# Altium PCB PCB1.PcbDoc
Units mm, origin at the board's own origin, x right, y up, seen from the top; angles counter-clockwise.
Board outline 38.86 x 37.59 mm, 2 copper layers (Top Layer, Bottom Layer); 20 components, 9 nets, 53 pads, 20 vias.
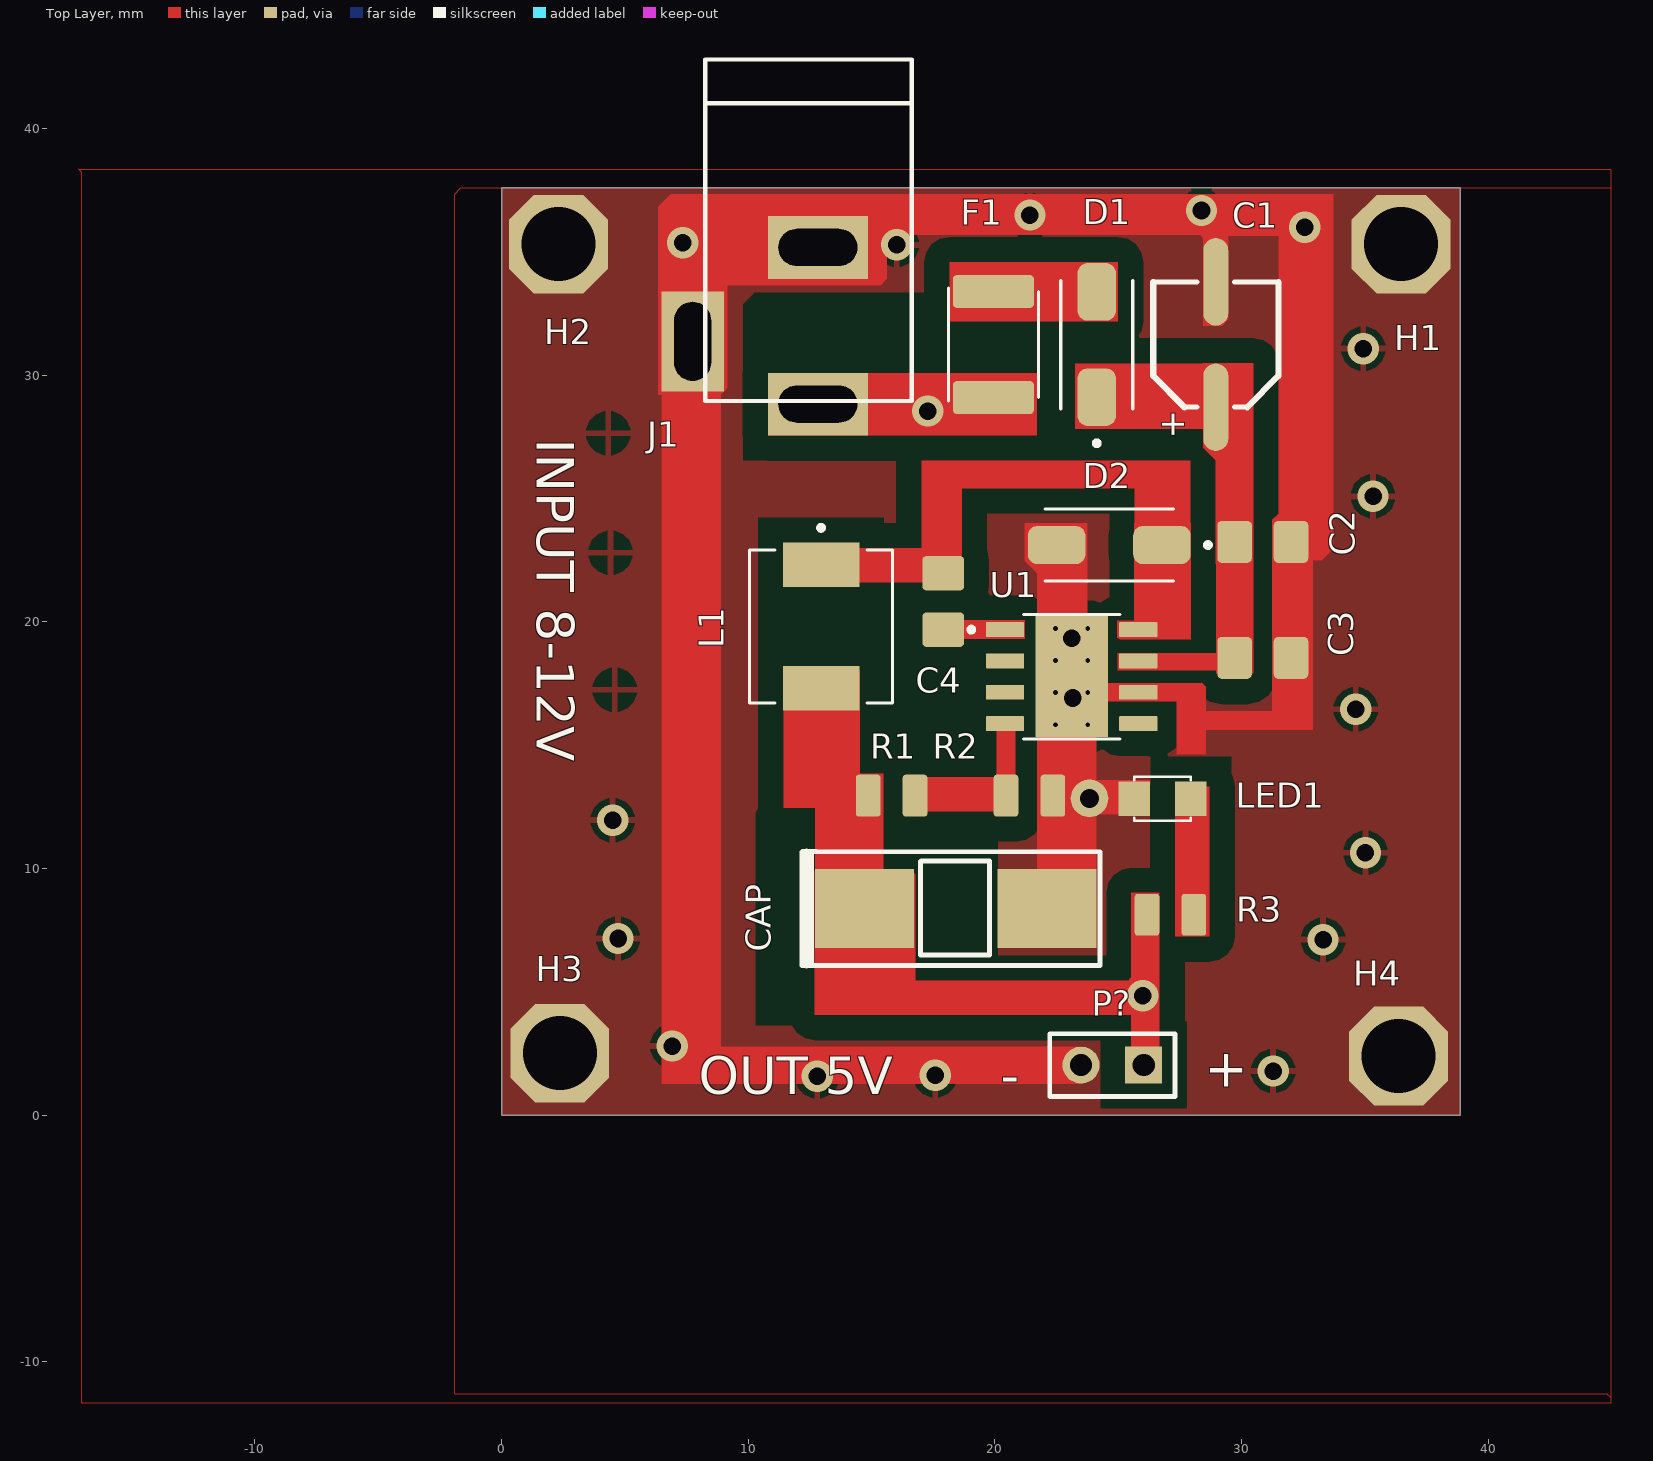
[diagram p0: Top Layer view]
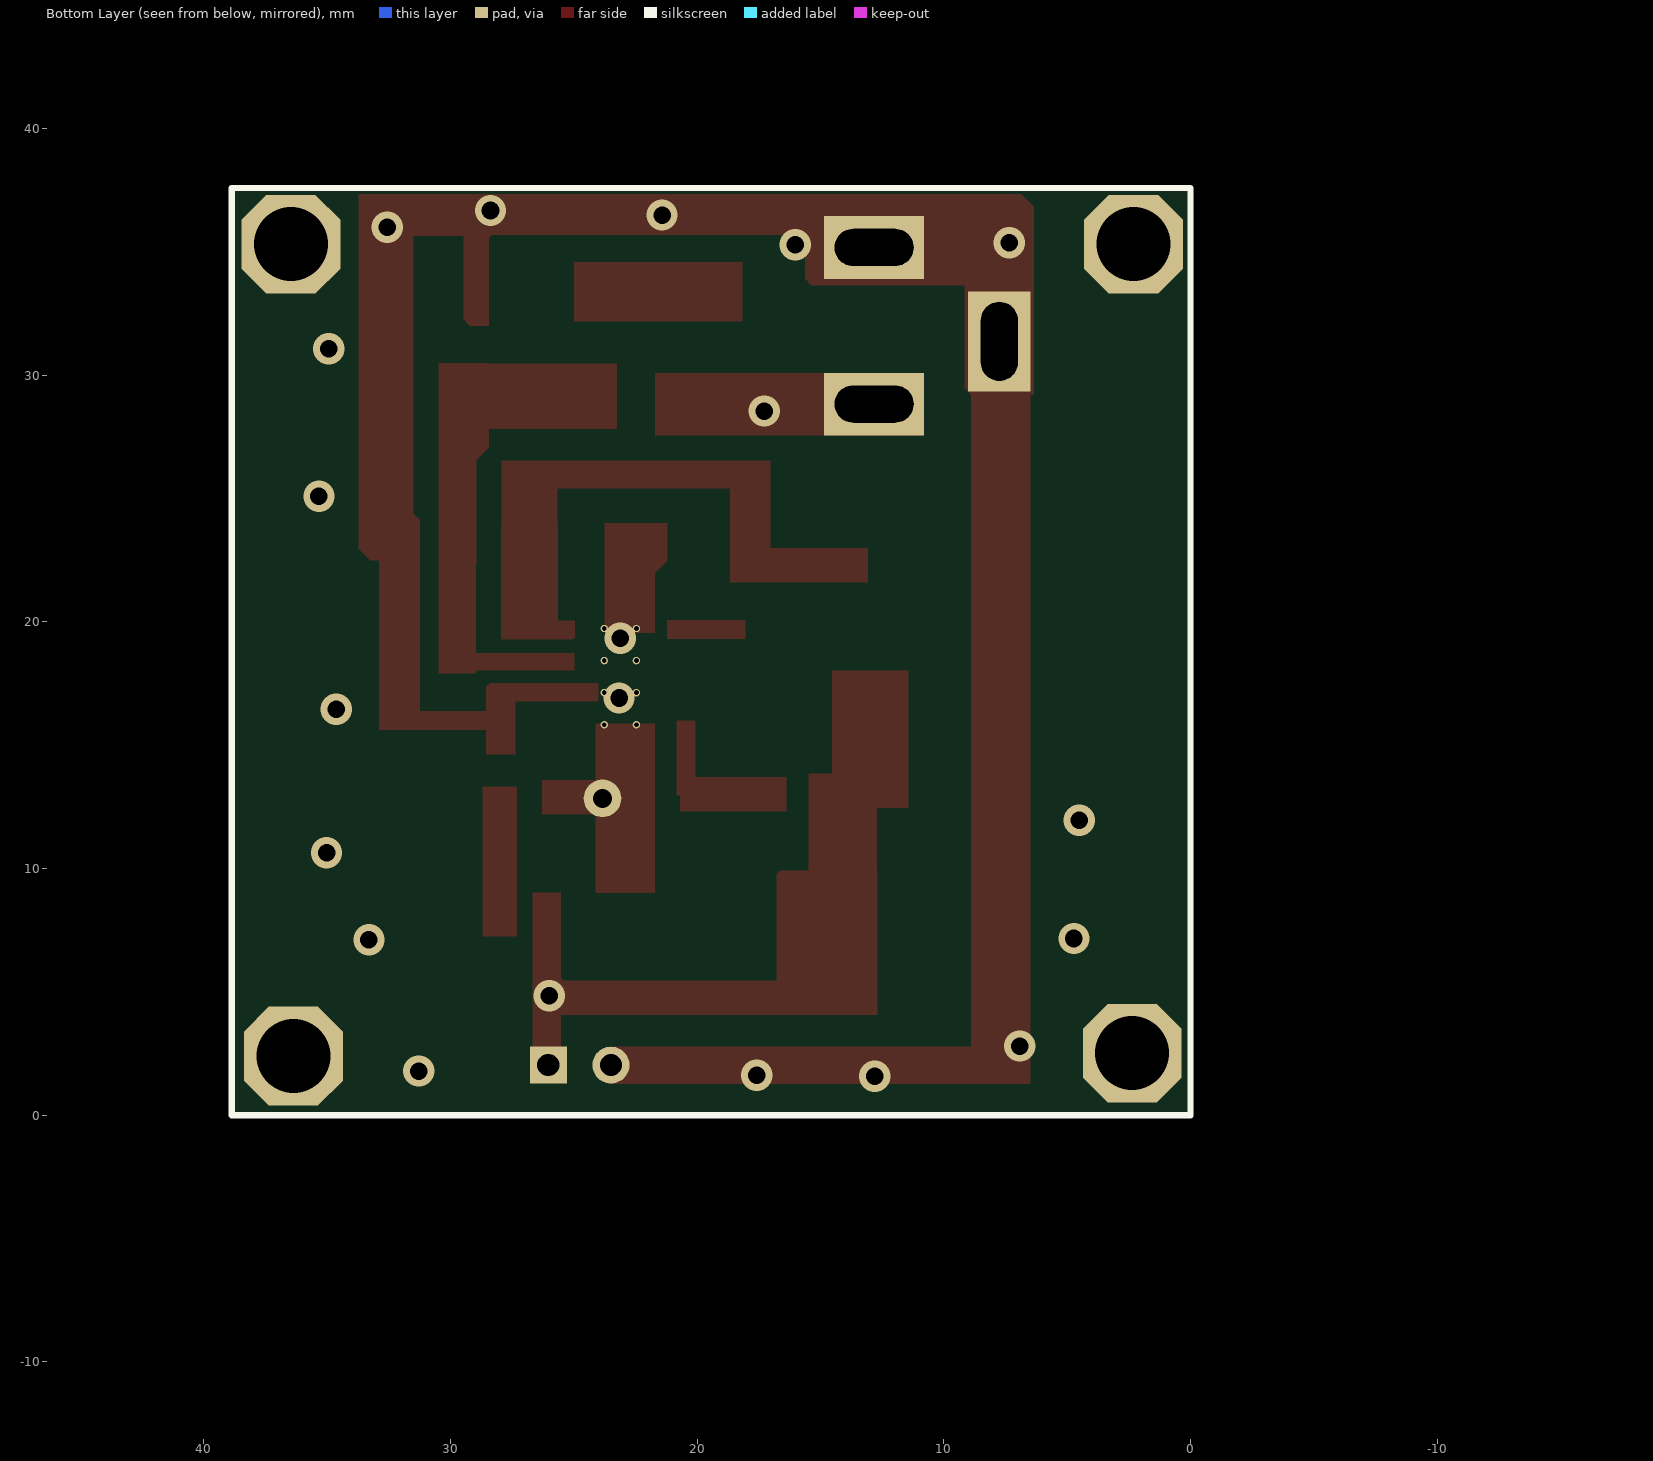
[diagram p1: Bottom Layer view, seen from below]
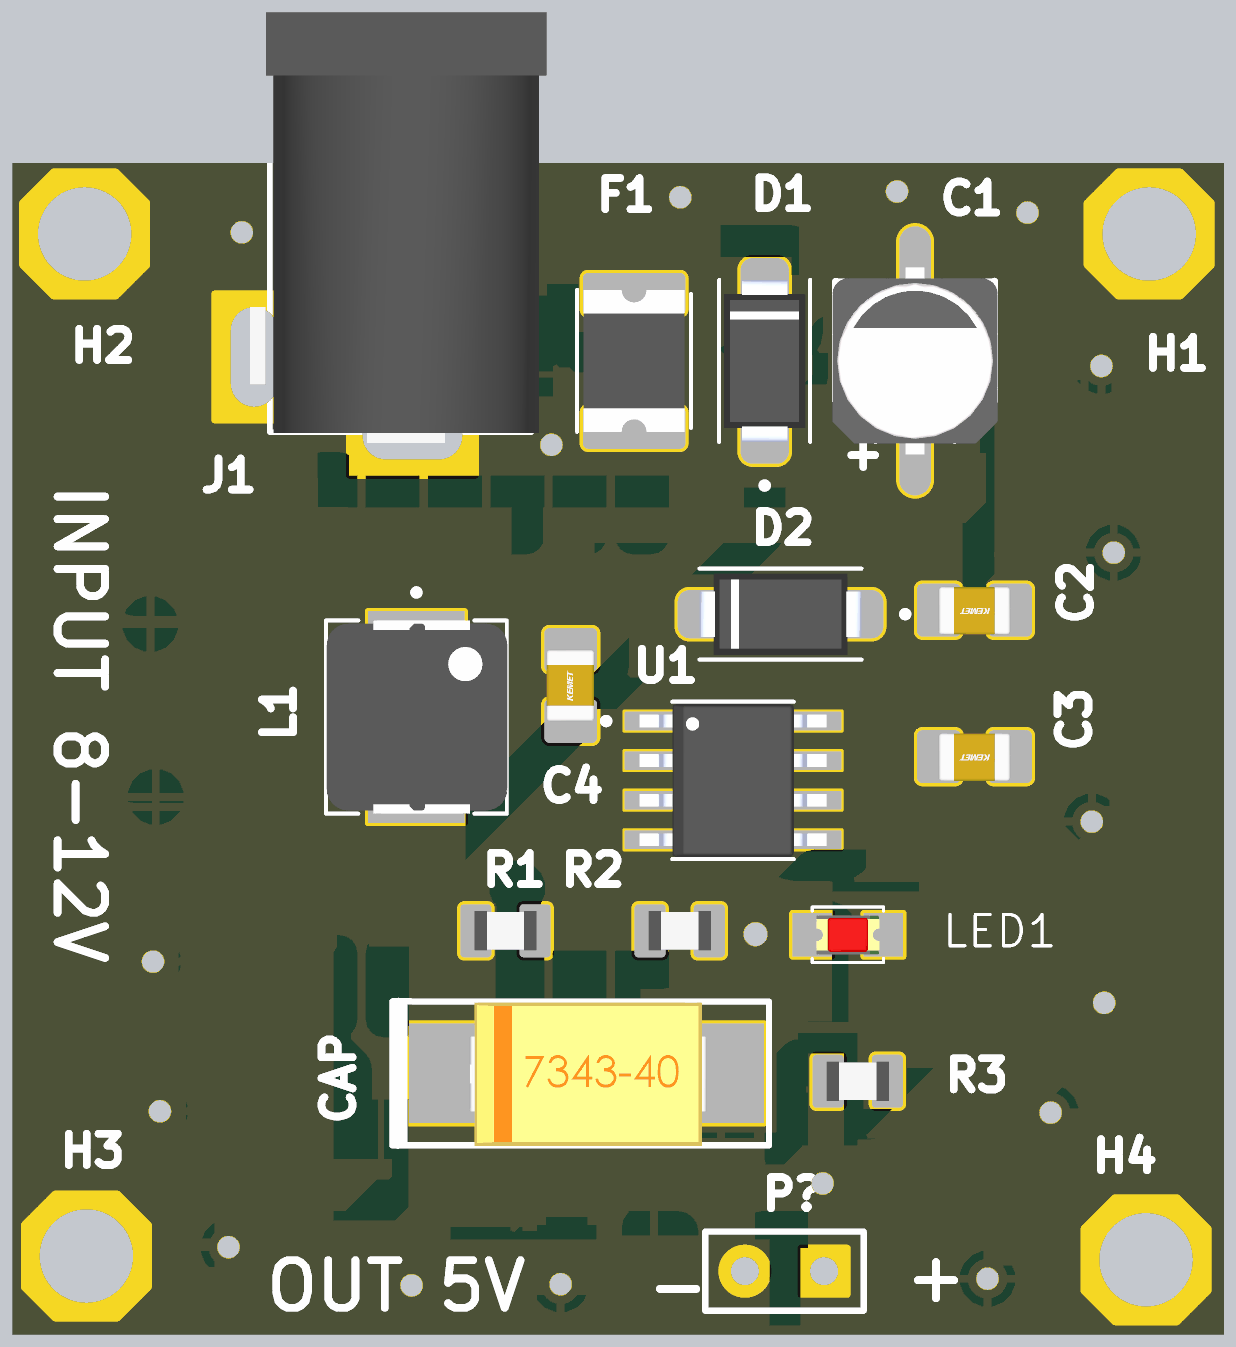
[diagram p2: 3D render of the assembled board from above, using the file's embedded part models]

## Layer stack, top to bottom
Top Solder: solder mask 0.0102, Solder Resist, Dk 3.5
Top Layer: signal copper 0.0356
Dielectric 1: dielectric 0.32, FR-4, Dk 4.8
Bottom Layer: signal copper 0.0356
Bottom Solder: solder mask 0.0102, Solder Resist, Dk 3.5

## Board outline
0,0 38.862,0 38.862,37.592 0,37.592

## Design rules (kind name [scope] priority, off if disabled: settings)
Clearance [All] p1: gap=1 ignorepadtopadclearanceinfootprint=FALSE
PolygonConnect PolygonConnect_5 [All vs IsNamedPolygon('GND_L01_P003')] p1: thpad.connectstyle=Direct thpad.reliefconductorwidth=0.254 thpad.reliefentries=4 thpad.polygonreliefangle="90 Angle" thpad.airgapwidth=0.254 smdpad.connectstyle=Direct smdpad.reliefconductorwidth=0.254 smdpad.reliefentries=4 smdpad.polygonreliefangle="90 Angle" smdpad.airgapwidth=0.254 via.connectstyle=Relief via.reliefconductorwidth=0.254 via.reliefentries=4 via.polygonreliefangle="90 Angle" via.airgapwidth=0.254
PolygonConnect PolygonConnect_4 [All vs IsNamedPolygon('GND_L01_P003')] p2: thpad.connectstyle=Direct thpad.reliefconductorwidth=0.254 thpad.reliefentries=4 thpad.polygonreliefangle="90 Angle" thpad.airgapwidth=0.254 smdpad.connectstyle=Direct smdpad.reliefconductorwidth=0.254 smdpad.reliefentries=4 smdpad.polygonreliefangle="90 Angle" smdpad.airgapwidth=0.254 via.connectstyle=Relief via.reliefconductorwidth=0.254 via.reliefentries=4 via.polygonreliefangle="90 Angle" via.airgapwidth=0.254
PolygonConnect PolygonConnect_3 [All vs IsNamedPolygon('NONET_L01_P003')] p3: thpad.connectstyle=Direct thpad.reliefconductorwidth=0.254 thpad.reliefentries=4 thpad.polygonreliefangle="90 Angle" thpad.airgapwidth=0.254 smdpad.connectstyle=Direct smdpad.reliefconductorwidth=0.254 smdpad.reliefentries=4 smdpad.polygonreliefangle="90 Angle" smdpad.airgapwidth=0.254 via.connectstyle=Relief via.reliefconductorwidth=0.254 via.reliefentries=4 via.polygonreliefangle="90 Angle" via.airgapwidth=0.254
PolygonConnect PolygonConnect_2 [All vs IsNamedPolygon('NONET_L01_P003')] p4: thpad.connectstyle=Direct thpad.reliefconductorwidth=0.254 thpad.reliefentries=4 thpad.polygonreliefangle="90 Angle" thpad.airgapwidth=0.254 smdpad.connectstyle=Direct smdpad.reliefconductorwidth=0.254 smdpad.reliefentries=4 smdpad.polygonreliefangle="90 Angle" smdpad.airgapwidth=0.254 via.connectstyle=Relief via.reliefconductorwidth=0.254 via.reliefentries=4 via.polygonreliefangle="90 Angle" via.airgapwidth=0.254
PolygonConnect PolygonConnect_1 [All vs IsNamedPolygon('NONET_L01_P003')] p5: thpad.connectstyle=Direct thpad.reliefconductorwidth=0.254 thpad.reliefentries=4 thpad.polygonreliefangle="90 Angle" thpad.airgapwidth=0.254 smdpad.connectstyle=Direct smdpad.reliefconductorwidth=0.254 smdpad.reliefentries=4 smdpad.polygonreliefangle="90 Angle" smdpad.airgapwidth=0.254 via.connectstyle=Relief via.reliefconductorwidth=0.254 via.reliefentries=4 via.polygonreliefangle="90 Angle" via.airgapwidth=0.254
PolygonConnect [All] p6: connectstyle=Relief reliefconductorwidth=0.254 reliefentries=4 polygonreliefangle="90 Angle" airgapwidth=0.254
RoutingVias [All] p1: holewidth=0.711 width=1.27 viastyle="Through Hole" minholewidth=0.711 minwidth=1.27 maxholewidth=0.711 maxwidth=1.27
SolderMaskExpansion [All] p1: expansion=0.102
Width [All] p1: maxlimit=2.5 minlimit=0.254 preferedwidth=0.8 minimp=50.000000 maximp=50.000000 favimp=50.000000
30 further rules are at their usual default settings.

## Components (designator, comment, footprint, x,y, rotation, side; value= is the part's Value field where it differs from the comment)
C1 "1000uF" "CAP SMD ELEC" 28.956,31.242 r90 top locked
C2 "100uF" CAP_0805 30.861,23.241 r180 top locked
C3 "100uF" CAP_0805 30.861,18.542 r180 top locked
C4 "0.1uF" CAP_0805 17.907,20.828 r90 top locked
CAP "100nF" "tu tantalum smd7343" 18.415,8.382 r0 top locked (schematic designator CAP_1)
D1 "B340A" B340A 24.13,31.242 r90 top locked
D2 "B340A-13" B340A 24.638,23.114 r180 top locked
F1 "2A 24V" "Cau chi tu phuc hoi 2A 24V SMD1812 - duplicate" 19.939,31.242 r90 top locked
H1 "IN" HOLE 36.467,35.314 r0 top locked (schematic designator H?)
H2 "IN" HOLE 2.311,35.314 r0 top locked
H3 "OUT" HOLE 2.365,2.519 r0 top locked
H4 "OUT" HOLE 36.366,2.399 r0 top locked (schematic designator H?)
J1 "JACK DC" "JACK DC" 10.287,32.004 r270 top locked value="Jac DC" (schematic designator JACK?)
L1 "100mH" "CUON CAM SMD 0530" 12.954,19.812 r270 top locked
LED1 "LED_0805_RED" LED-0805-Red 27.94,12.827 r180 top locked
P? "Header 2H" HDR1X2 26.035,2.032 r180 top locked
R1 "10k" RES_0805 15.814,12.954 r180 top locked
R2 "5.8k" RES_0805 21.402,12.954 r180 top locked
R3 "1k" RES_0805 27.117,8.128 r180 top locked
U1 "TPS5430" TPS5430DDAR 23.114,17.78 r0 top locked

## Footprints (in the part's own frame and the unit in brackets; to place one, negate y for a bottom-side part, rotate by r counter-clockwise, add the part's x,y. Pads: shape width x height; smd on the part's side, far side on the other; paste and mask are expansions set on the pad)
B340A [mm]
  rrect50% 2.33x1.55 smd mask+0.102: A(2.135,0) C(-2.135,0)
  silkscreen extent -4.1,-1.46 2.6,1.46, body extent -2.6,-1.3 2.6,1.3, height 2.4
"CAP SMD ELEC" [mil] "10-220uF"
  oval 140x40 smd mask+4: 1(-100,0) 2(100,0)
  silkscreen extent -100,-100 100,100, body extent -118,-104 118,104, height 232
CAP_0805 [mm]
  rrect25% 1.4x1.7 smd mask+0.102: 1(-1.143,0) 2(1.143,0)
  body extent -1.15,-0.76 1.15,0.79, height 1.01
"Cau chi tu phuc hoi 2A 24V SMD1812 - duplicate" [mm]
  rrect25% 1.34x3.29 smd mask+0.102: 1(-2.15,0) 2(2.15,0)
  silkscreen extent -2.28,-1.83 2.28,1.83, body extent -2.27,-1.62 2.27,1.62, height 1.25
"CUON CAM SMD 0530" [mm] "CUON CAM SMD 0530"
  rect 1.8x3.1 smd mask+0.102: 1(-2.5,0) 2(2.5,0)
  silkscreen extent -4.1,-2.9 3.1,2.9, body extent -3.1,-2.88 3.1,2.92, height 3
HDR1X2 [mm] "Connector; Header; 2 Position"
  rect 1.5x1.5 hole 0.9 mask+0.102: 1(0,0)
  round 1.5 hole 0.9 mask+0.102: 2(2.54,0)
  silkscreen extent -1.27,-1.27 3.81,1.27, body extent -1.27,-1.27 3.81,1.27, height 7
HOLE [mm]
  oct 4x4 hole 3 mask+0.102: H(0,0)
"JACK DC" [mm] "Jac DC input"
  rect 2.54x4.064 hole 1.5 slot 3.2 at 90 deg mask+0.102: 1(3.175,2.54) 2(-3.175,2.54)
  rect 4.064x2.54 hole 1.5 slot 3.2 at 0 deg mask+0.102: 3(0.635,-2.54)
  silkscreen extent -10.8,-2.03 3.05,6.35, body extent -10.42,-2.67 3.4,6.84, height 11.02
LED-0805-Red [mil]
  rect 50x55 smd mask+4: 1(0,0) 2(90,0)
  silkscreen extent 0,-35 90,35, body extent 5,-25 85,25, height 43
RES_0805 [mm]
  rrect25% 1x1.7 smd mask+0.102: 1(-0.95,0) 2(0.95,0)
  body extent -1,-0.63 1,0.63, height 0.47
TPS5430DDAR [mm]
  rrect10% 1.55x0.6 smd mask+0.102: 1(-2.7,1.905) 2(-2.7,0.635) 3(-2.7,-0.635) 4(-2.7,-1.905) 5(2.7,-1.905) 6(2.7,-0.635) 7(2.7,0.635) 8(2.7,1.905)
  rect 2.95x4.9 smd paste-3 mask+0.102: 9(0,0)
  round 0.3 hole 0.2 mask+0.102: 10(-0.65,1.95) 11(0.65,1.95) 12(-0.65,0.65) 13(0.65,0.65) 14(-0.65,-0.65) 15(0.65,-0.65) 16(-0.65,-1.95) 17(0.65,-1.95)
  silkscreen extent -4.17,-2.52 1.95,2.52, body extent -3,-2.45 3,2.45, height 1.7
"tu tantalum smd7343" [mm]
  rect 4x3.2 smd mask+0.102: 1(-3.7,0) 2(3.7,0)
  silkscreen extent -6.23,-2.31 5.85,2.31, body extent -3.75,-2.33 3.85,2.27, height 3.99

## Part data
C1: library part CAPACITOR
C2 C3 C4: library part CAP_0805, "Capacitor SMD 0805"
CAP: library part cap_tantan
D1: library part B340A-13, "Diode Schottky 40 V 3A Surface Mount SMA", Package="DO-214 Diodes Inc.", Availability="In Stock", Check_prices=https://www.snapeda.com/parts/B340A-13/Diodes+Inc./view-part/?ref=eda, MF="Diodes Inc.", MP=B340A-13, Price=None, Purchase-URL=https://pricing.snapeda.com/search/part/B340A-13/?ref=eda, SnapEDA_Link=https://www.snapeda.com/parts/B340A-13/Diodes+Inc./view-part/?ref=snap
D2: "Diode Schottky 40 V 3A Surface Mount SMA", Package="DO-214 Diodes Inc.", Availability="In Stock", Check_prices=https://www.snapeda.com/parts/B340A-13/Diodes+Inc./view-part/?ref=eda, MF="Diodes Inc.", MP=B340A-13, Price=None, Purchase-URL=https://pricing.snapeda.com/search/part/B340A-13/?ref=eda, SnapEDA_Link=https://www.snapeda.com/parts/B340A-13/Diodes+Inc./view-part/?ref=snap
F1: library part "Fuse self-recovering", "2A 24V SMD1812", Ma_Hang=MH010033, Ten="C?u Chì T? Ph?c H?i 2A 24V SMD1812"
H1 H2 H3 H4: library part HOLE
L1: library part INDUCTOR
R1 R2 R3: library part RES_0805, "Resistor SMD 0805"
P?: LatestRevisionDate=17-Jul-2002, LatestRevisionNote="Re-released for DXP Platform.", Publisher="Altium Limited"

## Free pads (board coordinates)
  round 1.524 hole 0.762 mask+0.102: 21(23.837,12.845)

## Via types
v1: diameter 1.27, hole 0.711, Top Layer to Bottom Layer, tented both sides, 20 vias

## Nets (pads, with @x,y where several pads share a name; then routed paths per layer and width w, separated by ;. In a path a pad name is that pad's centre, name@x,y a point inside that pad or via, vN(x,y) a via of type N, cw(c..) or ccw(c..) an arc to the next point about the centre after c; other vN are vias at no path point)
+3.3V: CAP.1 L1.2 P?.1 R1.2 R3.2
  other v1: 25.99,4.845
+12: F1.1 J1.1 | length 0.2
  Top Layer w0.8: F1.1@19.821,29.21 F1.1
  other v1: 17.285,28.547
GND: C1.2 C2.1 C3.1 CAP.2 D2.A H1.H H2.H H3.H H4.H J1.2 J1.3 LED1.2 P?.2 pad.21 R2.1 U1.6 U1.9
  other v1: 12.801,1.577 17.583,1.615 31.279,1.791 6.926,2.804 33.305,7.12 4.724,7.164 35.023,10.643 4.504,11.964 34.626,16.456 23.166,16.914 23.114,19.33 35.331,25.088 34.935,31.077 16.019,35.282 7.354,35.367 32.563,35.999 21.421,36.491 28.377,36.676
NetC1_1: C1.1 C2.2 C3.2 D1.C U1.7 | length 0.2
  Top Layer w0.8: C3.2@29.591,18.415 C3.2
NetC4_1: C4.1 U1.1
NetC4_2: C4.2 D2.C L1.1 U1.8
NetD1_A: D1.A F1.2
NetLED1_1: LED1.1 R3.1
NetR1_1: R1.1 R2.2 U1.4
pads on no net: U1.2 U1.3 U1.5 U1.10 U1.11 U1.12 U1.13 U1.14 U1.15 U1.16 U1.17

## Polygon pours and split planes (outlines as drawn)
GND on Top Layer "GND_L01_P003" (solid, pour order 3): 0,37.592 38.862,37.592 38.862,0 0,0
GND on Top Layer "NONET_L01_P001" (solid, shelved, pour order 1): -1.905,37.338 -1.651,37.592 44.958,37.592 44.958,-11.43 44.831,-11.303 -1.905,-11.303
GND on Top Layer "NONET_L01_P000" (solid, remove dead copper, shelved, pour order 0): 44.958,38.354 44.958,-11.684 -17.018,-11.684 -17.018,38.227 -17.145,38.354

## Other copper
Top Layer:
  rectangle net GND: 6.477,1.905 8.89,31.496
  rectangle net GND: 6.477,1.27 23.495,2.794
  rectangle net GND: 31.242,17.907 32.893,24.13
  rectangle net GND: 24.003,16.764 28.067,17.515
  rectangle net +3.3V: 25.527,1.524 26.67,4.445
  rectangle net NetLED1_1: 27.305,7.239 28.702,13.335
  rectangle net GND: 22.86,12.192 26.289,13.589
  rectangle net GND: 21.717,9.017 24.13,15.875
  rectangle net +3.3V: 13.208,12.446 14.859,13.843
  rectangle net +3.3V: 11.43,12.446 14.523,18.034
  rectangle net +3.3V: 12.709,8.509 15.494,13.854
  rectangle net NetR1_1: 20.066,12.954 20.828,16.002
  rectangle net NetR1_1: 16.383,12.319 20.701,13.716
  rectangle net NetC1_1: 24.969,18.034 29.464,18.735
  rectangle net NetC4_1: 18.034,19.315 21.214,20.066
  rectangle net NetC4_2: 17.145,25.4 27.813,26.543
  rectangle net NetC4_2: 25.654,22.606 27.94,26.543
  rectangle net NetC4_2: 17.018,22.098 18.669,26.543
  rectangle net NetC4_2: 13.081,21.59 18.669,22.987
  rectangle net NetC1_1: 28.956,17.907 30.48,23.495
  rectangle net +12: 10.795,27.559 21.717,30.099
  rectangle net NetC1_1: 23.241,27.813 28.829,30.48
  rectangle net NetD1_A: 18.161,32.171 24.987,34.58
  pour cut-out: 10.301,12.27 10.301,3.643 11.727,3.643 12.027,3.942 12.027,12.062 10.795,12.062 10.41,12.446
  pour cut-out: 9.795,31.099 9.795,32.87 10.272,33.347 17.254,33.347 17.254,31.967 17.979,31.242 17.733,30.996 17.733,30.752 10.142,30.752
  pour cut-out: 17.352,11.51 17.366,11.496 20.144,11.496 20.144,6.274 20.213,6.204 20.186,6.176 17.491,6.176 17.491,10.468 17.074,10.885 17.255,11.065 17.255,11.496
  pour cut-out: 15.778,14.571 19.095,14.571 19.105,14.582 19.024,14.663 19.024,18.285 16.958,18.285 16.338,18.906 16.338,21.093 10.416,21.093 10.406,21.103 10.406,18.773 14.903,18.773 15.259,18.417 15.259,14.52 16.938,14.52 16.979,14.561
  region net GND: 27.813,17.515 28.37,17.515 28.379,17.524 28.541,17.361 28.541,14.628 27.347,14.628 27.378,14.659 27.378,17.373
  region net GND: 29.255,37.338 33.72,37.338 33.72,22.965 33.254,22.498 31.389,22.498 31.389,23.983 31.242,24.13 31.499,24.387 31.499,35.662 29.497,35.662 29.212,35.947
  region net GND: 15.621,34.925 15.621,33.909 15.367,33.655 9.144,33.655 9.144,29.464 8.89,29.21 6.35,29.21 6.35,36.83 6.858,37.338 10.795,37.338
  region net GND: 10.795,37.338 29.464,37.338 29.464,32.258 29.21,32.004 28.448,32.004 28.448,35.56 28.321,35.687 15.621,35.687 15.621,34.163 15.494,34.036 10.795,34.036
  region net GND: 27.559,17.515 27.559,15.621 32.893,15.621 32.893,19.431 31.242,19.431 31.242,16.383 28.067,16.383 28.067,17.515
  region net +3.3V: 26.67,9.017 26.67,4.191 26.543,4.064 12.7,4.064 12.7,4.191 12.7,9.906 16.637,9.906 16.764,9.779 16.764,5.461 25.4,5.461 25.527,5.588 25.527,9.017
  region net NetC4_2: 25.069,19.304 27.94,19.304 27.94,24.003 25.654,24.003 25.654,20.066 25.643,20.055 24.969,20.036 24.969,19.365 25.001,19.332
  region net GND: 21.209,22.479 21.717,21.971 21.717,19.558 23.749,19.558 23.749,24.003 21.209,24.003 21.209,23.876
  region net NetC1_1: 30.48,22.352 30.48,30.48 28.448,30.48 28.448,27.051 28.956,26.543 28.956,22.352

## Silkscreen, mask and mechanical layers (free items; w line width, h text height)
Top Overlay:
  text "INPUT 8-12V" at 1.428,27.418 h1.52 r270
  text "+" at 28.516,1.15 h1.52
  text "-" at 20.239,0.87 h1.52
  text "OUT 5V" at 7.999,0.847 h1.52
Bottom Overlay:
  the board outline again, w0.254

## Text inside footprints (layer, text, board x,y; h text height)
C1: Top Overlay "+" at 27.686,27.432 h1 r90